# Altium PCB openmv4_wd.PcbDoc (part 1 of 2)
Units mil, origin at the board's own origin, x right, y up, seen from the top; angles counter-clockwise.
Board outline 6000 x 4000 mil, 2 copper layers (Top Layer, Bottom Layer); 54 components, 90 nets, 396 pads, 358 vias.
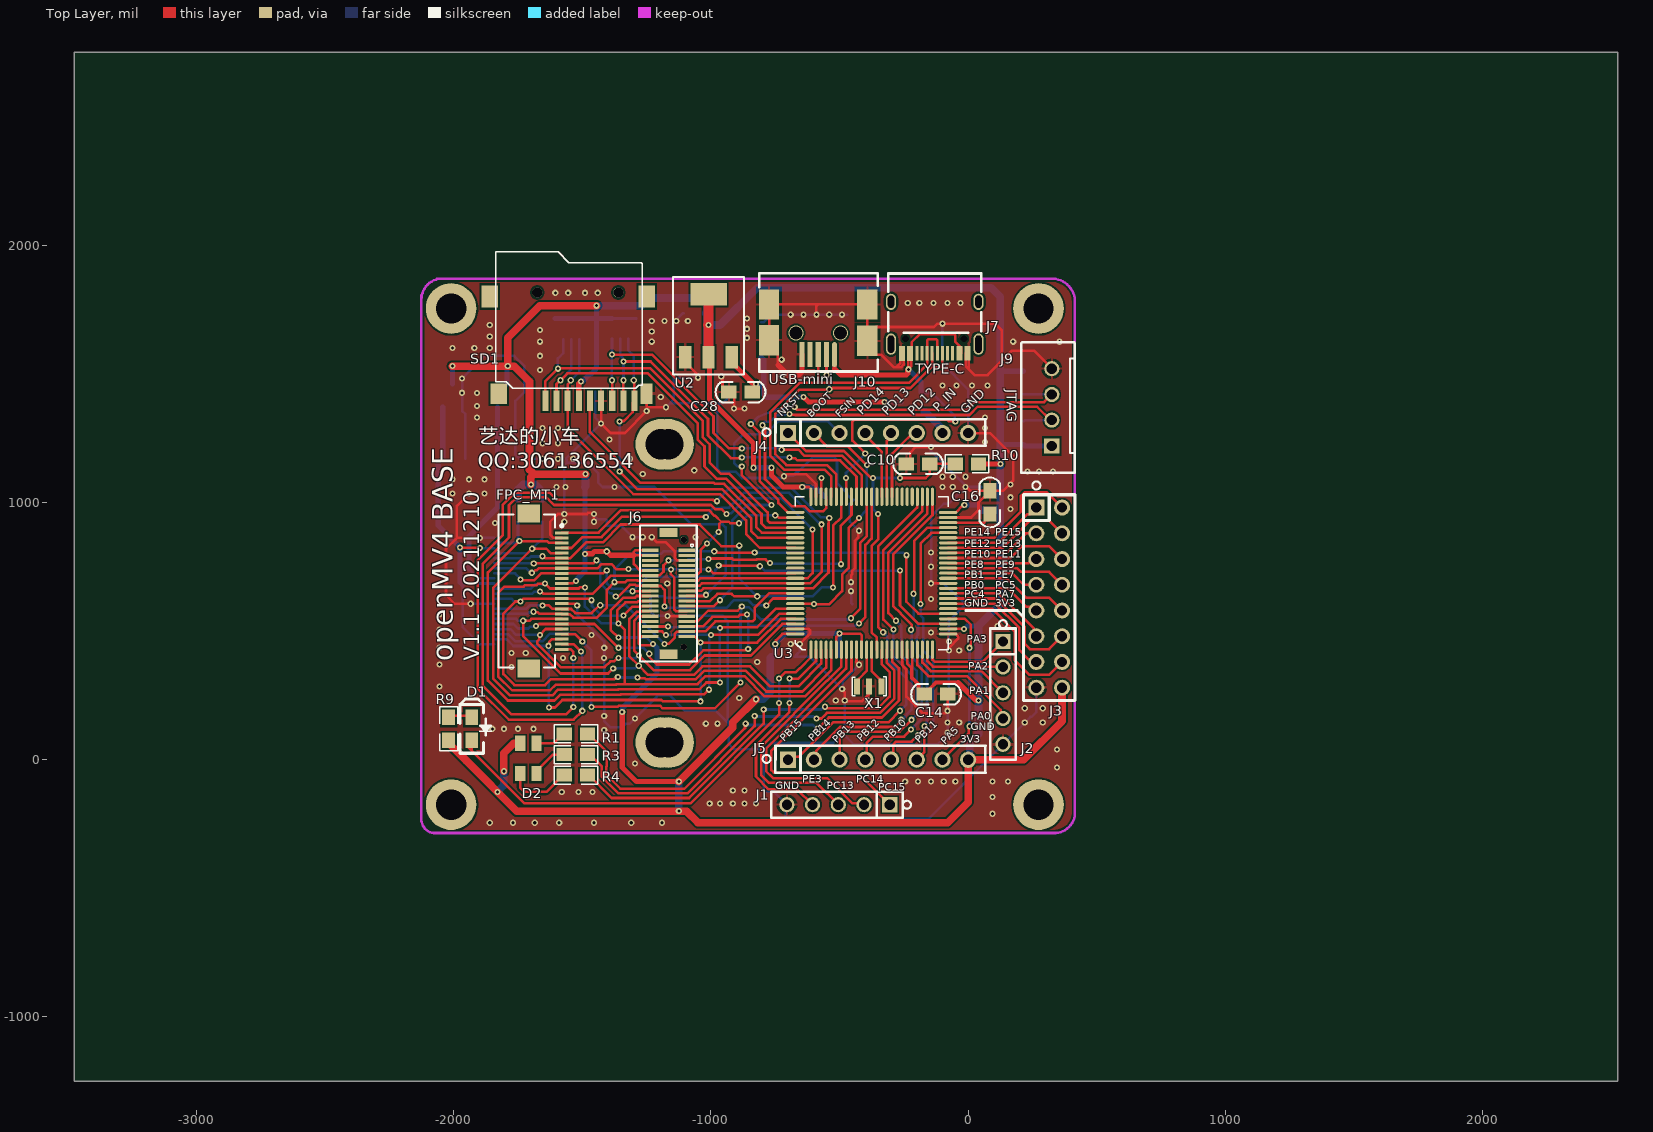
[diagram p0: Top Layer view]
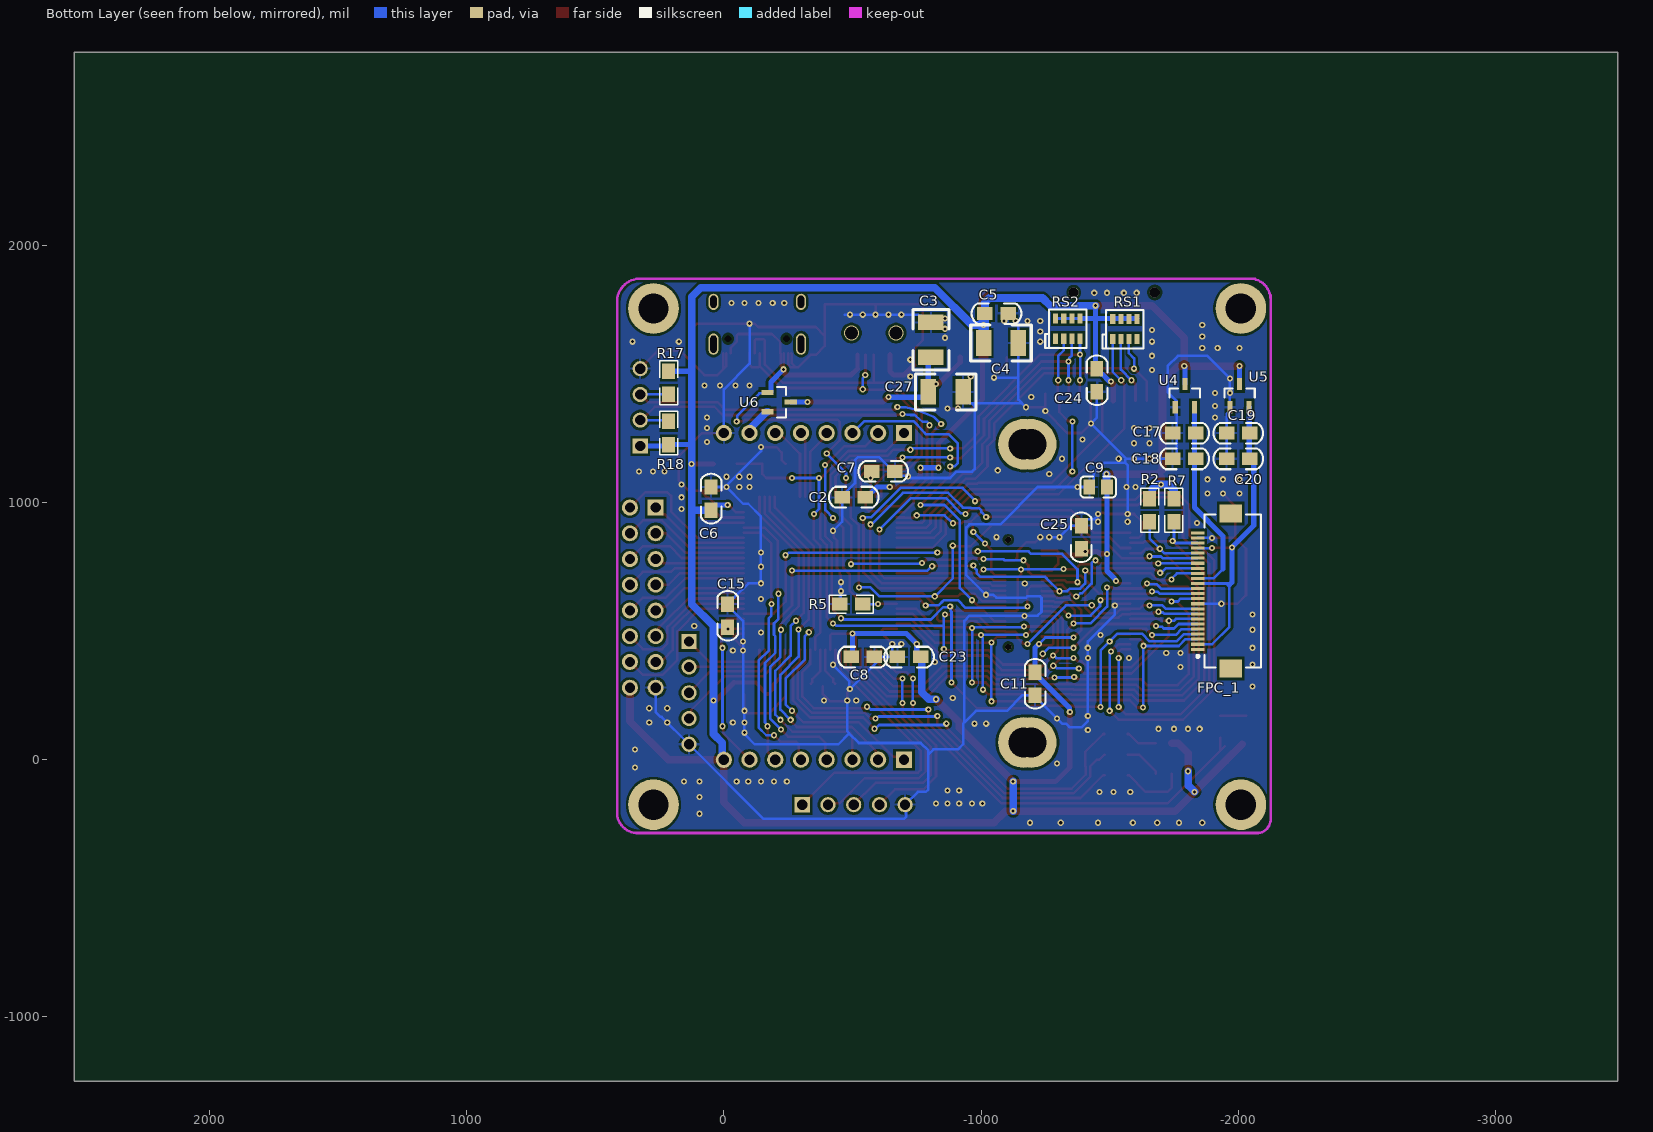
[diagram p1: Bottom Layer view, seen from below]

## Layer stack, top to bottom
Top Solder: solder mask 0.4, Solder Resist, Dk 3.5
Top Layer: signal copper 1.4
Dielectric 1: dielectric 12.6, FR-4, Dk 4.8
Bottom Layer: signal copper 1.4
Bottom Solder: solder mask 0.4, Solder Resist, Dk 3.5

## Board outline
-3475,-1250 2525,-1250 2525,2750 -3475,2750

## Design rules (kind name [scope] priority, off if disabled: settings)
Clearance [All] p1: gap=8 ignorepadtopadclearanceinfootprint=TRUE
PolygonConnect PolygonConnect_1 [IsVia] p1: connectstyle=Direct reliefconductorwidth=10 reliefentries=4 polygonreliefangle="90 Angle" airgapwidth=10
PolygonConnect [All] p2: connectstyle=Relief reliefconductorwidth=10 reliefentries=4 polygonreliefangle="90 Angle" airgapwidth=10
RoutingVias [All] p1: holewidth=12 width=24 viastyle="Through Hole" minholewidth=12 minwidth=24 maxholewidth=28 maxwidth=50
SolderMaskExpansion [All] p1: expansion=4 istentingtop=FALSE
Width [All] p1: maxlimit=40 minlimit=10 preferedwidth=10 minimp=50.000000 maximp=50.000000 favimp=50.000000
30 further rules are at their usual default settings.

## Components (designator, comment, footprint, x,y, rotation, side; value= is the part's Value field where it differs from the comment)
C2 "104" 0805C -460,1020 r180 bottom
C3 "47uF" 1210 -805,1565 r90 bottom value=22uF/10V
C4 "47uF" 1210 -1010,1620 r180 bottom value=22uF/10V
C5 "104" 0805C -1105,1735 r0 bottom
C6 "104" 0805C 50,1060 r270 bottom
C7 "2.2uf" 0805C -575,1120 r180 bottom
C8 "104" 0805C -585,400 r0 bottom
C9 "10uF" LC-0805_C -1455.55,1060 r180 bottom
C10 "104" 0805C -240,1150 r0 top
C11 "104" 0805C -1210,340 r270 bottom
C14 "104" 0805C -80,255 r180 top
C15 "104" 0805C -15,605 r270 bottom
C16 "2.2uf" 0805C 85,955 r90 top
C17 "104" 0805C -1835,1270 r0 bottom
C18 "106" 0805C -1835,1170 r0 bottom
C19 "104" 0805C -2045,1270 r0 bottom
C20 "106" 0805C -2045,1170 r0 bottom
C23 "104" 0805C -765,400 r0 bottom
C24 "104" 0805C -1450,1520 r270 bottom
C25 "104" 0805C -1390,820 r90 bottom
C27 "47uF" 1210 -795,1430 r180 bottom value=22uF/10V
C28 "104" 0805C -840,1430 r180 top
D1 "LED" 0805D -1930,165 r270 top
D2 "RGB_LED" LED_3528_RGB -1710,5 r90 top
FPC_1 "FPC_24" FPC_24 -1975,655 r90 bottom locked
FPC_MT1 "FPC_24" FPC_24 -1712.25,656 r270 top locked
J1 "IO" SIP5 -305,-175 r180 top
J2 "IO" SIP5 135,460 r270 top
J3 "SIP16" IDC16 265,-20 r270 top
J4 "SIP8" SIP8 -700,1270 r0 top locked
J5 "SIP8" SIP8 -700,0 r0 top locked
J6 "camera" ? -1165,410 r90 top locked
J7 "TYPE-C" "USB TYPE-C-16PIN_A" -130,1780 r180 top
J9 "JTAG" SIP4-1 325,1520 r270 top
J10 "USB-mini" USB-MINI -520,1575 r180 top
R1 "1K" 0805R -1480,100 r180 top value=300R
R2 "10K" 0805R -1655,925 r90 bottom
R3 "1K" 0805R -1480,20 r180 top value=300R
R4 "1K" 0805R -1570,-60 r0 top value=300R
R5 "10K" 0805R -540,605 r0 bottom
R7 "10K" 0805R -1750,1015 r270 bottom
R9 "1K" 0805R -2020,75 r90 top
R10 "10K" 0805R 40,1150 r180 top
R17 "10K" 0805R 215,1420 r90 bottom
R18 "10K" 0805R 215,1315 r270 bottom
RS1 "4.7k" 0603*4 -1606.5,1713.74 r0 bottom
RS2 "4.7K" 0603*4 -1384.49,1715 r0 bottom
SD1 "micro SD" TF卡座 -1545,1685 r90 top locked
U2 "1117-3.3" SOT223 -1100,1565 r0 top locked
U3 "STM32H743VIT6" "LQFP100 14X14_N" -375,725 r0 top locked
U4 "XC6206 1V5" SOT23-3N -1792.4,1415 r180 bottom
U5 "XC6206 2V8" SOT23-3N -2005,1415 r180 bottom
U6 "BAT54C" SOT23-3N -215,1390 r270 bottom
X1 "12M" XTAL-3215-3P -385,285 r0 top

## Footprints (in the part's own frame and the unit in brackets; to place one, negate y for a bottom-side part, rotate by r counter-clockwise, add the part's x,y. Pads: shape width x height; smd on the part's side, far side on the other; paste and mask are expansions set on the pad)
0603*4 [mm]
  rect 0.5x1 smd: 1(0,0) 2(0.8,0) 3(1.6,0) 4(2.4,0) 5(2.4,2) 6(1.6,2) 7(0.8,2) 8(0,2)
  silkscreen extent -0.64,-0.89 3.43,2.92
0805C [mil]
  rect 60x50 smd: 1(0,0) 2(90,0)
  silkscreen extent -52,-39 142,41
0805D [mil]
  rect 60x50 smd: 1(0,0) 2(90,0)
  silkscreen extent -71,-46 140,78
0805R [mil]
  rect 60x50 smd: 1(0,0) 2(90,0)
  silkscreen extent -40,-35 130,35
1210 [mil]
  rect 60x100 smd: 1(0,0) 2(135,0)
  silkscreen extent -50,-70 185,70
FPC_24 [mm]
  rect 0.3x1.3 smd: 1(-5.739,3.359) 2(-5.239,3.359) 3(-4.739,3.359) 4(-4.239,3.359) 5(-3.739,3.359) 6(-3.239,3.359) 7(-2.739,3.359) 8(-2.239,3.359) 9(-1.739,3.359) 10(-1.239,3.359) 11(-0.739,3.359) 12(-0.239,3.359) 13(0.261,3.359) 14(0.761,3.359) 15(1.261,3.359) 16(1.761,3.359) 17(2.261,3.359) 18(2.761,3.359) 19(3.261,3.359) 20(3.761,3.359) 21(4.261,3.359) 22(4.761,3.359) 23(5.261,3.359) 24(5.761,3.359)
  rect 1.8x2.2 smd: 25(-7.639,0.109) 26(7.661,0.109)
  silkscreen extent -7.54,-2.89 7.56,3.48, body extent -8.05,-3.05 8.15,2.95, height 2
IDC16 [mil]
  rect 62x62 hole 40: 1(-1000,0)
  round 62 hole 40: 2(-1000,100) 3(-900,0) 4(-900,100) 5(-800,0) 6(-800,100) 7(-700,0) 8(-700,100) 9(-600,0) 10(-600,100) 11(-500,0) 12(-500,100) 13(-400,0) 14(-400,100) 15(-300,0) 16(-300,100)
  silkscreen extent -1102,-50 -250,150
LC-0805_C [mm]
  rect 1.16x1.47 smd: 1(-0.875,0) 2(0.875,0)
  silkscreen extent -1.76,-1.04 1.76,1.04, body extent -1,-0.63 1,0.63, height 0.77
LED_3528_RGB [mm]
  rect 1.5x1 smd: 1(1.5,-0.8) 2(-1.5,-0.8) 3(-1.5,0.8) 4(1.5,0.8)
  body extent -1.79,-1.34 1.71,1.46, height 1.9
"LQFP100 14X14_N" [mm] "100脚，体宽14x14mm，脚距0.5mm"
  oval 0.3x1.8 smd: 1(-6,-7.55) 2(-5.5,-7.55) 3(-5,-7.55) 4(-4.5,-7.55) 5(-4,-7.55) 6(-3.5,-7.55) 7(-3,-7.55) 8(-2.5,-7.55) 9(-2,-7.55) 10(-1.5,-7.55) 11(-1,-7.55) 12(-0.5,-7.55) 13(0,-7.55) 14(0.5,-7.55) 15(1,-7.55) 16(1.5,-7.55) 17(2,-7.55) 18(2.5,-7.55) 19(3,-7.55) 20(3.5,-7.55) 21(4,-7.55) 22(4.5,-7.55) 23(5,-7.55) 24(5.5,-7.55) 25(6,-7.55) 51(6,7.55) 52(5.5,7.55) 53(5,7.55) 54(4.5,7.55) 55(4,7.55) 56(3.5,7.55) 57(3,7.55) 58(2.5,7.55) 59(2,7.55) 60(1.5,7.55) 61(1,7.55) 62(0.5,7.55) 63(0,7.55) 64(-0.5,7.55) 65(-1,7.55) 66(-1.5,7.55) 67(-2,7.55) 68(-2.5,7.55) 69(-3,7.55) 70(-3.5,7.55) 71(-4,7.55) 72(-4.5,7.55) 73(-5,7.55) 74(-5.5,7.55) 75(-6,7.55)
  oval 1.8x0.3 smd: 26(7.55,-6) 27(7.55,-5.5) 28(7.55,-5) 29(7.55,-4.5) 30(7.55,-4) 31(7.55,-3.5) 32(7.55,-3) 33(7.55,-2.5) 34(7.55,-2) 35(7.55,-1.5) 36(7.55,-1) 37(7.55,-0.5) 38(7.55,0) 39(7.55,0.5) 40(7.55,1) 41(7.55,1.5) 42(7.55,2) 43(7.55,2.5) 44(7.55,3) 45(7.55,3.5) 46(7.55,4) 47(7.55,4.5) 48(7.55,5) 49(7.55,5.5) 50(7.55,6) 76(-7.55,6) 77(-7.55,5.5) 78(-7.55,5) 79(-7.55,4.5) 80(-7.55,4) 81(-7.55,3.5) 82(-7.55,3) 83(-7.55,2.5) 84(-7.55,2) 85(-7.55,1.5) 86(-7.55,1) 87(-7.55,0.5) 88(-7.55,0) 89(-7.55,-0.5) 90(-7.55,-1) 91(-7.55,-1.5) 92(-7.55,-2) 93(-7.55,-2.5) 94(-7.55,-3) 95(-7.55,-3.5) 96(-7.55,-4) 97(-7.55,-4.5) 98(-7.55,-5) 99(-7.55,-5.5) 100(-7.55,-6)
  silkscreen extent -7.57,-7.57 7.57,7.54
SIP4-1 [mm]
  rect 1.5x1.5 hole 1: 1(7.62,0)
  round 1.5 hole 1: 2(5.08,0) 3(2.54,0) 4(0,0)
  silkscreen extent -2.6,-3 10.26,2.29
SIP5 [mm]
  rect 1.5x1.5 hole 1: 1(0,0)
  round 1.5 hole 1: 2(2.54,0) 3(5.08,0) 4(7.62,0) 5(10.16,0)
  silkscreen extent -2.1,-1.27 11.68,1.27
SIP8 [mm]
  rect 1.6x1.6 hole 1: 1(0,0)
  round 1.6 hole 1: 2(2.54,0) 3(5.08,0) 4(7.62,0) 5(10.16,0) 6(12.7,0) 7(15.24,0) 8(17.78,-0.008)
  silkscreen extent -2.53,-1.27 19.51,1.37
SOT23-3N [mm] "3x1.3x1mm(长宽高)"
  rect 0.5x1.2 smd: 1(-0.95,-1.143) 2(0.95,-1.143) 3(0,1.143)
  silkscreen extent -1.5,-0.2 1.5,0.7, body extent -1.5,-1.2 1.5,1.2, height 1.05
SOT223 [mm]
  rect 1.2x2.2 smd: 1(0,0) 2(2.3,0) 3(4.6,0)
  rect 3.6x2.2 smd: 4(2.3,6.2)
  silkscreen extent -1.2,-1.7 5.8,7.9
TF卡座 [mm]
  round 1 hole 1 unplated: 0(3.334,-4.696) 0(3.334,3.305)
  rect 2x0.6 smd: 1(-7.366,2.505) 2(-7.366,1.405) 3(-7.366,0.305) 4(-7.366,-0.795) 5(-7.366,-1.895) 6(-7.366,-2.995) 7(-7.366,-4.095) 8(-7.366,-5.195) 9(-7.366,-6.295)
  rect 2x1.2 smd: 10(-6.666,-7.495)
  rect 2.2x1.6 smd: 11(2.934,-7.495) 12(2.934,8.005)
  rect 2x1.6 smd: 13(-6.666,7.105)
  silkscreen extent -6.12,-7.04 7.35,7.4, body extent -7.82,-7.8 9.38,8.3, height 3.2
"USB TYPE-C-16PIN_A" [mm]
  round 0 hole 0.65: 0(-2.89,3.65) 0(2.89,3.65)
  oval 1x2.1 hole 0.6 slot 1.7 at 90 deg: 1(-4.32,4.18) 1(4.32,4.18)
  oval 1x1.6 hole 0.6 slot 1.2 at 90 deg: 1(-4.32,0) 1(4.32,0)
  rect 0.3x1.45 smd: A1(-3.375,5.092) A4(-2.6,5.092) A5(-1.25,5.092) A6(-0.25,5.092) A7(0.25,5.092) A8(-1.75,5.092) A9(2.6,5.1) A12(3.375,5.1) B1(3.075,5.1) B4(2.3,5.1) B5(1.75,5.092) B6(0.75,5.092) B7(-0.75,5.092) B8(1.25,5.092) B9(-2.3,5.092) B12(-3.075,5.092)
  silkscreen extent -4.57,-2.79 4.57,3.05, body extent -4.47,-2.6 4.47,5.3, height 3.25
USB-MINI [mm]
  rect 2x3 smd: 0(-3.25,-1.346) 0(-3.25,-4.946) 0(6.45,-1.425) 0(6.45,-4.946)
  oval 0.5x2.45 smd: 1(0,0)
  rect 0.5x2.45 smd: 2(0.8,0) 3(1.6,0) 4(2.4,0) 5(3.2,0)
  round 1.5 hole 1.3: ""(-0.6,-2.125) ""(3.8,-2.125)
  silkscreen extent -4.27,-8.03 7.44,1.68
XTAL-3215-3P [mm]
  rect 0.6x1.6 smd: 1(-1.2,0) 2(0,0) 3(1.2,0)
  silkscreen extent -1.68,-0.94 1.68,0.94, body extent -1.6,-0.74 1.6,0.76, height 0.9
? [mil] "DF12-36-DS"
  round 24 hole 24: 1(27.56,-59.06) 1(445.22,-59.06)
  rect 12x63 smd: 1(404.22,-70.87) 2(404.22,71) 3(384.22,-70.87) 4(384.22,71) 5(364.22,-70.87) 6(364.22,71) 7(345.22,-70.87) 8(345.22,71) 9(325.22,-70.87) 10(325.22,71) 11(305.22,-70.87) 12(305.22,71) 13(286.22,-70.87) 14(286.22,71) 15(266.22,-70.87) 16(266.22,71) 17(246.22,-70.87) 18(246.22,71) 19(226.38,-70.87) 20(226.38,71) 21(206.69,-70.87) 22(206.69,71) 23(187.01,-70.87) 24(187.01,71) 25(167.32,-70.87) 26(167.32,71) 27(147.64,-70.87) 28(147.64,71) 29(127.95,-70.87) 30(127.95,71) 31(108.27,-70.87) 32(108.27,71) 33(88.58,-70.87) 34(88.58,71) 35(68.9,-70.87) 36(68.9,71)
  rect 36x71 smd: F1(473.22,0) F2(0,0)
  round 196.85 hole 118.11: ""(-342.99,0) ""(-342.99,30) ""(816.21,30) ""(816.22,0)
  silkscreen extent -29,-110 501,110

## Part data
C2 C6 C7 C8 C9 C10 C11 C14 C15 C16 C17 C18 C19 C20 C23 C24 C25 C28: library part CAP
C3 C4 C27: library part "Cap Pol1", "Polarized Capacitor (Radial)", LatestRevisionDate=17-Jul-2002, LatestRevisionNote="Re-released for DXP Platform.", PackageReference=RB7.6-15, Published=8-Jun-2000, Publisher="Altium Limited"
C5: library part CAP104
D2: "三色高亮LED"
J1 J2: library part SIP5
J6: library part IDC36
J7: library part USB_C
J9: library part SIP4
J10: library part USB-CON-MICRO-B-5S, BOM_Manufacturer=ValuePro, BOM_Manufacturer Part=USB-CON-MICRO-B-5S, BOM_Supplier=LCSC, BOM_Supplier Part=C40954, image=//image.lceda.cn/szlcsc/C40954.jpg, spicePre=U, spiceSymbolName=USB-CON-MICRO-B-5S
R1 R3 R4 R17 R18: library part Res2, "Resistor", LatestRevisionDate=17-Jul-2002, LatestRevisionNote="Re-released for DXP Platform.", PackageReference=AXIAL-0.4, Published=8-Jun-2000, Publisher="Altium Limited"
R2 R5 R7 R9 R10: library part RES
RS1 RS2: library part RS
U2: library part 1117
U4 U5: library part XC6206P332MR, "低压差线性稳压芯片", BOM名称=低压差线性稳压芯片, 学习资源=www.ooocke.com, 版权归属=源创客
X1: library part XTAL_3P

## Free pads (board coordinates)
  round 196.85 hole 118.11: 0(-2010,-175) 0(-2010,1754.13) 0(273.46,-175) 0(273.46,1754.13)

## Via types
v1: diameter 24, hole 12, Top Layer to Bottom Layer, 358 vias

## Nets (pads, with @x,y where several pads share a name; then routed paths per layer and width w, separated by ;. In a path a pad name is that pad's centre, name@x,y a point inside that pad or via, vN(x,y) a via of type N, cw(c..) or ccw(c..) an arc to the next point about the centre after c; other vN are vias at no path point)
1V5: C17.1 C18.1 FPC_1.15 U4.2 | length 787
  Bottom Layer w10: -1940,740.86 -1903.77,704.63 FPC_1.15@-1842.75,704.63
  Bottom Layer w20: -1940,740.86 -1940,870 -1829.8,980.2 U4.2@-1829.8,1370
2V8: C19.1 C20.1 FPC_1.2 FPC_1.14 FPC_1.21 U5.2 | length 1310.4
  Top Layer w10: v1(-1975,825) -1973.87,823.87 -1898.39,823.87 v1(-1897.26,822.74)
  Bottom Layer w10: v1(-1897.26,822.74) FPC_1.21@-1842.75,822.74 ; FPC_1.2@-1842.75,448.72 -1898.72,448.72 -1965,515 -1965,680 -1960.06,684.94 FPC_1.14@-1842.75,684.94
  Bottom Layer w20: U5.2@-2042.4,1370 -2042.4,1270 -2042.4,1170 C20.1@-2045,1170 -2060,1155 -2060,910 v1(-1975,825) -1975,690 -1965,680
3V3: C2.2 C4.1 C5.2 C6.2 C8.2 C9.2 C11.1 C14.2 C15.2 C23.1 C24.1 C25.1 D2.4 FPC_MT1.11 J3.16 J5.8 J6.2 J6.4 J6.10 J6.20 J6.30 J6.36 J9.1 R2.2 R7.1 R9.1 R10.1 R17.2 R18.2 RS1.1 RS1.2 RS1.3 RS1.4 RS2.1 RS2.2 RS2.3 RS2.4 SD1.4 U2.2 U2.4 U3.6 U3.11 U3.20 U3.21 U3.27 U3.50 U3.75 U3.100 U4.3 U5.3 | length 15656.8
  Top Layer w10: FPC_MT1.11@-1580,685.11 -1538.68,685.11 -1528.79,695 v1(-1525,695) ; v1(-1360,475) -1390,505 -1390,579.54 -1339.72,629.82 -1294.47,629.82 -1287.91,636.38 J6.20@-1236,636.38 ; J6.36@-1236.68,479.58 J6.36@-1236,478.9 -1278.04,478.9 -1281,481.86 ; J6.30@-1236,537.95 -1236.69,537.27 -1272.88,537.27 -1281,529.15 -1281,481.86 ; J6.10@-1236,735.22 -1275.22,735.22 -1300,760 -1300,795 ; J6.4@-1236,794.22 -1299.22,794.22 -1300,795 ; J6.2@-1236,814.22 -1294.14,814.22 -1300,808.36 -1300,795 ; v1@-1230,450 -1235,445 -1275.14,445 -1281,450.86 -1281,481.86 ; v1(-750,450) -747.32,452.68 -747.32,464.14 -722.68,488.78 U3.100@-672.24,488.78 ; v1(-645,1060) -619.94,1060 -611.22,1051.28 U3.75@-611.22,1022.24 ; U3.6@-512.8,427.76 -512.8,477.2 v1(-500,490) -420.23,490 -414.37,484.14 U3.11@-414.37,427.76 ; U3.20@-237.2,427.76 -237.2,374.03 -222,358.82 -222,317 -217.52,312.52 -217.52,317 U3.21@-217.52,427.76 ; C14.2@-193.11,275 -173.11,255 C14.2@-170,255 ; U3.27@-77.76,508.46 v1(-16.54,508.46) v1@-15,510 ; U3.50@-77.76,961.22 -48.23,961.22 -22.13,987.32 -17.68,987.32 v1(-15,990) ; v1@30,230 v1(40,230)
  Top Layer w15: -217.52,317 -193.11,292.59 C14.2@-193.11,275 ; C14.2@-170,255 -165,255 -147.5,272.5 -147.5,277.5 -125,300 -40,300
  Top Layer w20: SD1.4@-1513.69,1395 -1513.69,1461.31 v1(-1505,1470) ; v1(-1490,800) -1489.23,800.77 -1461.66,800.77 -1452.43,810 -1406.85,810 v1@-1405,808.15 ; v1@-1405,805 -1400,805 -1390,795 -1300,795 ; v1(-1345,185) -1345,-30 -1290,-85 v1(-1125,-85) ; U2.2@-1009.45,1565 -1005,1560.55 -1005,1400 -835,1230 v1(-835,1135) ; v1(-765,1135) -764.23,1134.23 -764.23,1105.57 -718.67,1060 v1(-645,1060) ; -40,300 v1@30,230 ; R10.1@40,1150 v1(125,1150)
  Top Layer w30: R9.1@-2015,60 -1950,-5 -1755,-200 v1(-1125,-200) -1095,-200 -1050,-245 -80,-245 0,-165 J5.8@0,-0.32 0,0 215,0 365,150 J3.16@365,280 ; v1(-2005,1530) v1(-1790,1530) ; v1(-1805,-45) -1805,25 -1765.94,64.06 D2.4@-1741.5,64.06 ; v1(-1700,1070) -1700,1097.43 -1687.43,1110 ; v1(-1487.52,1110) -1687.43,1110 ; v1(-1445,1765) -1665,1765 -1790,1640 v1(-1790,1530) ; v1(-1125,-85) -915,125 -915,145 v1(-825,235) ; v1(-1790,1530) -1765,1530 -1705,1470 -1705,1127.57 -1687.43,1110
  Top Layer w40: U2.2@-1009.45,1565 -1009.45,1689.45 v1(-1010,1690) -1009.45,1690.55 U2.4@-1009.45,1809.09
  Bottom Layer w10: RS1.1@-1606.5,1713.74 RS1.1@-1605.24,1715 ; RS2.1@-1384.49,1715 RS2.2@-1352.99,1715 RS2.3@-1321.5,1715 RS2.4@-1290,1715 ; v1(-1360,475) -1250,475 v1(-1225,450) ; C23.1@-765,400 C23.1@-750,415 ; C2.2@-555,1020 C2.2@-550,1020 ; C8.2@-500,405 C8.2@-495,400 ; v1(-16.54,508.46) C15.2@-5,520
  Bottom Layer w20: U5.3@-2005,1460 v1(-2005,1530) ; U4.3@-1792.4,1460 -1792.4,1526.52 -1790,1528.92 v1(-1790,1530) ; RS1.1@-1605.24,1715 -1445,1715 ; v1(-1525,695) -1525,696.08 -1519.23,701.85 -1519.23,704.55 -1490,733.79 v1(-1490,800) C9.2@-1490,1060 ; v1(-1505,1470) -1504.23,1470.77 -1499.23,1470.77 -1470,1500 -1465,1500 -1450,1515 C24.1@-1450,1520 -1445,1525 -1445,1715 ; v1(-1445,1765) -1445,1715 ; RS2.1@-1384.49,1715 -1445,1715 ; v1(-1345,185) -1344.23,185.77 -1344.23,200.77 -1210,335 C11.1@-1210,340 -1210,435 v1(-1225,450) ; v1(-835,1135) v1(-765,1135) ; C23.1@-750,415 v1(-750,450) -710,490 v1(-500,490) C8.2@-500,405 ; v1(-645,1060) -595,1060 C2.2@-555,1020 ; v1(-15,990) 35,990 50,975 C6.2@50,970 ; C15.2@-5,520 40,520 ; 125,1220 130,1225 R18.2@215,1225 220,1220 J9.1@325,1220 ; 125,1505 130,1510 R17.2@215,1510
  Bottom Layer w30: v1(-1830,-125) -1805,-100 v1(-1805,-45) ; R7.1@-1750,1015 -1750,1050 -1730,1070 v1(-1700,1070) -1682.57,1070 -1665,1052.43 -1665,1025 R2.2@-1655,1015 ; C9.2@-1490,1060 -1487.52,1062.48 v1(-1487.52,1110) ; v1(-1445,1765) -1268.79,1765 -1238.79,1795 -1032.57,1795 -1015,1777.43 C5.2@-1015,1735 ; v1(-1125,-200) v1(-1125,-85) ; v1(-1010,1690) -965,1690 -820,1835 90,1835 125,1800 125,1505 125,1220 v1(125,1150) 125,970 ; v1(-825,235) -797.57,235 -770,262.57 -770,395 C23.1@-765,400 ; J5.8@0,0 6.31,6.31 6.31,66.31 40,100 v1(40,230) 40,520 125,605 125,970 ; C6.2@50,970 125,970
  Bottom Layer w40: C5.2@-1015,1735 -1010,1730 v1(-1010,1690) C4.1@-1010,1620
  other v1: -1405,810
5V_IN: J7.A4 J7.A9 J7.B4 J7.B9 J10.1 U3.68 U6.1 | length 1857.4
  Top Layer w10: v1(-475,1095) -473.77,1093.77 -473.77,1022.59 U3.68@-473.43,1022.24 ; v1(-400,1190) -450,1240 -450,1314.14 -442.14,1322 -82,1322 -75,1315 v1(-50,1315) ; v1@-235.04,1514.96 v1(-232.36,1517.64) ; J7.A9@-232.36,1579.22 v1(-232.36,1517.64) ; J7.A4@-27.63,1579.53 -27.63,1602.17 -50,1624.54 -50,1649.14 -55.86,1655 -187.41,1655 -219.65,1622.76 -219.65,1580.12 J7.B4@-220.55,1579.22 -220.55,1529.45 v1(-232.36,1517.64)
  Top Layer w15: -520,1520 J10.1@-520,1575
  Top Layer w20: -520,1520 -494.96,1494.96 -240.9,1494.96 -235.04,1500.82 v1@-235.04,1514.96
  Bottom Layer w10: v1(-475,1095) -475,1115 v1@-401.51,1188.49 ; U6.1@-170,1427.4 -166.46,1423.86 -138.86,1423.86 -52.68,1337.68 -52.68,1317.68 v1(-50,1315)
  Bottom Layer w20: v1(-232.36,1517.64) -183.37,1468.64 -183.37,1427.56 -183.21,1427.4 U6.1@-170,1427.4
BOOT0: J4.2 R5.1 U3.94 | length 1051.4
  Top Layer w10: U3.94@-672.24,606.89 -671.9,606.54 -601.54,606.54 v1(-600,605) -540,605 -490,655 -490,720 -465,745 -465,900 v1(-425,940) ; J4.2@-599.36,1269.36 -548,1218 -468,1218 -396.21,1146.21 v1(-393.79,1146.21)
  Bottom Layer w10: v1(-600,605) R5.1@-540,605 ; v1(-425,940) -395,970 -395,1145 v1(-393.79,1146.21)
"DCMI CLK": FPC_1.12 FPC_MT1.13 J6.12 U3.67 | length 1716.4
  Top Layer w10: v1(-1664.66,654.47) -1660.88,654.47 -1652.47,646.06 -1652.14,645.74 FPC_MT1.13@-1580,645.74 -1579.26,645 -1460,645 -1390,715 -1335.19,715 -1334.37,715.82 -1279.56,715.82 -1278.95,715.22 J6.12@-1236,715.22 -1235,716.22 -1199.12,716.22 -1184.34,730.99 -1184.34,755.74 v1(-1165.08,775) ; v1(-1010,780) -1008,782 -917.36,782 -913.36,778 -822.18,778 -821.18,779 -787.79,779 -773.79,765 v1(-770,765) ; v1(-495,760) -495,910 -453.74,951.26 U3.67@-453.74,1022.24
  Bottom Layer w10: FPC_1.12@-1842.75,645.57 -1693.97,645.57 -1687.22,652.32 -1666.81,652.32 v1(-1664.66,654.47) ; v1(-1165.08,775) -1091.38,775 -1086.38,780 v1(-1010,780) ; v1(-770,765) -767.5,762.5 -497.5,762.5 v1(-495,760)
"DCMI D0": FPC_1.6 FPC_MT1.19 J6.31 U3.63 | length 2440.4
  Top Layer w10: v1(-1680,520) -1676.21,520 -1668.58,527.63 -1452.63,527.63 v1(-1360,435) ; v1(-1240,412) -1241.86,410.14 -1241.86,401.86 -1210,370 -1085,370 -1030,425 -867.86,425 -865.36,427.5 -857.86,427.5 v1(-855.18,430.18) ; J6.31@-1094.13,518.27 -1031.73,518.27 -994.57,555.43 -894.57,555.43 -887,563 -862,563 v1(-860.18,564.82) ; v1(-425,530) -400,555 -400,834.54 -375,859.54 U3.63@-375,1022.24
  Bottom Layer w10: FPC_1.6@-1842.75,527.46 -1767.46,527.46 -1750,510 -1710,510 -1702.68,517.32 -1682.68,517.32 v1(-1680,520) ; v1(-1360,435) -1263,435 v1(-1240,412) ; v1(-860.18,564.82) -859.82,564.82 -855,560 -855,525 ; v1(-855.18,430.18) -855,430.36 -855,525 ; v1(-425,530) -427.86,530 -437.86,520 -850,520 -855,525
"DCMI D1": FPC_1.4 FPC_MT1.21 J6.29 U3.64 | length 2848.1
  Top Layer w10: FPC_MT1.21@-1580,488.26 -1528.26,488.26 v1(-1500,460) ; v1(-1465,205) -1363.18,205 -1358.18,210 -1198.5,210 -1188.5,200 -985,200 v1(-885,300) ; J6.29@-1094.13,537.95 -1052.05,537.95 -1010.99,579.01 -895.99,579.01 v1(-880,595) ; v1(-455,550) -455,550.97 -420,585.97 -420,842.83 -395.03,867.8 -395.03,991.88 -394.68,992.23 U3.64@-394.68,1022.24
  Bottom Layer w10: FPC_1.4@-1842.75,488.09 -1788.09,488.09 -1760,460 -1655,460 -1625,490 -1530,490 -1465,425 v1(-1465,205) ; v1(-885,300) -885,450 -885.18,450.18 -885.18,575.18 -882.68,577.68 -882.68,592.32 v1(-880,595) -878,593 -853,593 -805,545 -467.86,545 -465.54,547.32 -457.68,547.32 v1(-455,550)
"DCMI D2": FPC_1.3 FPC_MT1.22 J6.35 U3.97 | length 1841.9
  Top Layer w10: v1(-1631.95,442.76) -1629.27,445.44 -1629.27,457.87 -1618.57,468.58 FPC_MT1.22@-1580,468.58 ; v1@-1630,210 v1(-1630,203) -1607,203 -1578,232 -1192.22,232 -1187.22,227 v1(-1040,227) ; J6.35@-1094.13,478.9 -1093.13,477.9 -1083,477.9 -1062.9,477.9 v1(-1040,455) -927.41,455 -927.23,455.18 -821.1,455.18 -728.45,547.83 U3.97@-672.24,547.83
  Bottom Layer w10: FPC_1.3@-1842.75,468.41 -1795,468.41 -1768.59,442 -1632.71,442 v1(-1631.95,442.76) -1630.97,441.79 -1630.97,203.97 v1(-1630,203) ; v1(-1040,227) v1(-1040,455)
"DCMI D3": FPC_1.5 FPC_MT1.20 J6.28 U3.98 | length 1690.5
  Top Layer w10: v1(-1665.18,485.18) -1667.86,482.5 -1667.86,467.6 -1675,460.46 -1675,450.46 -1584.54,360 -1413.18,360 -1391.18,382 -1376.79,382 -1363.79,395 v1(-1360,395) ; v1@-1665,485.18 -1665,485.64 -1642.69,507.95 FPC_MT1.20@-1580,507.95 ; J6.28@-1236,557.64 -1280.99,557.64 -1299,539.63 -1299,424.18 -1280,405.18 v1(-1280,405) -1223,348 -1081.54,348 -1024.54,405 -845,405 -721.85,528.15 U3.98@-672.24,528.15
  Bottom Layer w10: FPC_1.5@-1842.75,507.78 -1780,507.78 -1757.45,485.23 v1(-1665.18,485.18) v1(-1665.18,485.18) ; v1(-1360,395) -1292.86,395 -1282.86,405 v1(-1280,405)
"DCMI D4": FPC_1.7 FPC_MT1.18 J6.26 U3.3 | length 2001.6
  Top Layer w10: FPC_MT1.18@-1580,547.32 -1697.68,547.32 -1705,540 v1(-1730,540) -1730,480 -1585,335 -1400,335 v1(-1380,355) ; J6.26@-1236,577.32 -1236.69,576.64 -1271.28,576.64 -1272.1,575.82 -1288.27,575.82 -1317,547.09 -1317,401.54 v1(-1280.73,365.27) -1245.46,330 -1066.72,330 -1033.72,363 -848,363 -770,285 -660,285 -571.85,373.15 U3.3@-571.85,427.76
  Bottom Layer w10: FPC_1.7@-1842.75,547.15 -1757.15,547.15 -1750,540 v1(-1730,540) ; v1(-1380,355) -1294.79,355 -1284.52,365.27 v1(-1280.73,365.27)
"DCMI D5": FPC_1.9 FPC_MT1.16 J6.33 U3.92 | length 1379.3
  Top Layer w10: v1(-1655,600) -1630,600 -1616.69,586.69 FPC_MT1.16@-1580,586.69 -1579.22,585.91 -1543.25,585.91 -1527.35,570 -1463.79,570 -1433.38,600.41 v1(-1430.41,600.41) ; v1(-1180,450) -1165,450 -1140,475 -1140,490 -1132.1,497.9 -1094.81,497.9 J6.33@-1094.13,498.58 -1021.42,498.58 -982.57,537.43 -838.43,537.43 -830,545.86 -830,590 -773.74,646.26 U3.92@-672.24,646.26
  Bottom Layer w10: FPC_1.9@-1842.75,586.52 -1841.97,587.3 -1717.7,587.3 -1705,600 v1(-1655,600) ; v1(-1430.41,600.41) -1430,600 -1330,600 v1(-1180,450)
"DCMI D6": FPC_1.11 FPC_MT1.14 J6.24 U3.4 | length 2437
  Top Layer w10: v1(-1465,620) -1468.79,620 -1474.84,626.06 FPC_MT1.14@-1580,626.06 -1728.94,626.06 v1(-1740,615) -1760,615 -1807,568 -1807,332.46 -1764.54,290 -1645,290 -1623,312 -1377.36,312 -1374.27,315.09 -1371.7,315.09 -1365.79,321 v1(-1362,321) ; v1(-1340,560) -1306.18,593.82 -1279.56,593.82 -1277.05,596.32 -1236.68,596.32 J6.24@-1236,597.01 ; v1(-1285,320) -1282.32,317.32 -1258.23,317.32 -1252.91,312 -1059.27,312 -1026.27,345 -864.54,345 -784.54,265 -645,265 -552.17,357.83 U3.4@-552.17,427.76
  Bottom Layer w10: FPC_1.11@-1842.75,625.89 -1775.89,625.89 -1765,615 v1(-1740,615) ; v1(-1465,620) -1462.32,617.32 -1462.32,596.97 -1425.36,560 v1(-1340,560) ; v1(-1362,321) -1360.5,319.5 -1285.5,319.5 v1(-1285,320)
"DCMI D7": FPC_1.13 FPC_MT1.12 J6.22 U3.5 | length 3060.8
  Top Layer w10: v1(-1490,670) -1510,670 -1514.57,665.43 FPC_MT1.12@-1580,665.43 -1625.43,665.43 v1(-1645,685) -1645.64,684.36 -1672,684.36 -1679.04,677.32 -1724.49,677.32 -1728.82,673 -1802,673 -1827,648 -1827,324.17 -1772.83,270 -1624.85,270 -1602.85,292 -1369.07,292 -1367.07,294 -1051.81,294 -1020.81,325 -870,325 -791,246 -634.46,246 -555.46,325 -555,325 -532.48,347.52 U3.5@-532.48,427.76 ; -1335,294 -1335,505 -1362.68,532.68 -1362.68,540.54 -1365,542.86 -1365,579.09 -1332.27,611.82 -1287.01,611.82 -1282.14,616.69 J6.22@-1236,616.69
  Bottom Layer w10: FPC_1.13@-1842.75,665.26 -1699.74,665.26 -1682.68,682.32 -1647.68,682.32 v1(-1645,685) ; v1(-1490,670) -1490,595 -1425,530 v1(-1360,530)
"DCMI HSYNC": FPC_1.16 FPC_MT1.9 J6.18 U3.28 | length 2150.9
  Top Layer w10: v1(-1740,700) -1737.32,697.32 -1687.32,697.32 -1670,714.64 -1670,715 -1660.52,724.48 FPC_MT1.9@-1580,724.48 -1435.46,724.48 ; -1435,724.95 -1435.46,724.48 ; v1(-1405,735) -1408.79,735 -1419.31,724.48 -1435.46,724.48 ; v1(-1304.82,654.82) -1304.12,655.52 -1236.7,655.52 J6.18@-1236,656.22 ; v1(-970,755) -968.5,753.5 -811.5,753.5 v1(-810,752) ; v1(-265,735) -265,600 -193.15,528.15 U3.28@-77.76,528.15
  Bottom Layer w10: FPC_1.16@-1842.75,724.31 -1760.94,724.31 -1740,703.37 v1(-1740,700) ; v1(-1405,735) -1405,684.64 -1385.36,665 -1345,665 -1335,655 -1305,655 v1(-1304.82,654.82) -1255,704.64 -1255,705.14 -1249.14,711 -997.99,711 -983,725.99 -983,738.21 -970,751.21 v1(-970,755) ; v1(-810,752) -808.21,752 -791.21,735 v1(-265,735)
"DCMI PCLK": FPC_1.8 FPC_MT1.17 J6.14 U3.30 | length 2304.2
  Top Layer w10: v1(-1690,575) -1688.41,573.41 -1673.41,573.41 -1667,567 FPC_MT1.17@-1580,567 -1579.22,566.22 -1549.02,566.22 -1534.8,552 -1443.46,552 -1405.41,590.05 -1405.41,609.59 -1405,610 -1405,660 v1(-1375,690) -1333.02,690 -1325.2,697.82 -1287.01,697.82 -1285.41,696.22 J6.14@-1236,696.22 ; v1(-987.14,810) -984.46,807.32 -976.61,807.32 -974.28,805 v1(-830,805) ; v1(-240,795) -240,613.99 -193.53,567.52 U3.30@-77.76,567.52
  Bottom Layer w10: FPC_1.8@-1842.75,566.83 -1841.97,567.61 -1711.93,567.61 -1707.22,572.32 -1692.68,572.32 v1(-1690,575) ; v1(-1375,690) -1375,740 -1315,800 -1195,800 -1185,810 v1(-987.14,810) ; v1(-830,805) -253.79,805 -243.79,795 v1(-240,795)
"DCMI PWDN": FPC_1.17 FPC_MT1.8 J6.25 U3.88 | length 1420.3
  Top Layer w10: v1(-1696.41,726.41) -1692.63,726.41 -1683.04,736 -1677.28,736 -1669.75,743.53 -1656.47,743.53 -1655.83,744.17 FPC_MT1.8@-1580,744.17 -1579.22,744.95 -1439.7,744.95 -1424.64,760 -1386.48,760 -1366.48,740 -1320.82,740 v1(-1320,740.82) ; v1(-1155,740) -1155.91,739.09 -1155.91,720.91 -1142.32,707.32 -1142.32,583.18 -1136.47,577.32 J6.25@-1094.13,577.32 ; v1(-1010,740) -1006.21,740 -991.21,725 U3.88@-672.24,725
  Bottom Layer w10: FPC_1.17@-1842.75,744 -1717.79,744 -1700.2,726.41 v1(-1696.41,726.41) ; v1(-1320,740.82) -1319.59,740.41 -1155.41,740.41 v1(-1155,740) v1(-1010,740)
"DCMI RST": FPC_1.19 FPC_MT1.6 J6.21 U3.69 | length 2240
  Top Layer w10: v1(-1655,790.85) -1652.06,790.85 -1644.75,783.54 FPC_MT1.6@-1580,783.54 -1546.46,783.54 -1485,845 -1420,845 -1350.78,914.22 -1044.22,914.22 -960,830 -892,830 v1(-890,832) ; J6.21@-1094.13,616.69 -1029.8,616.69 -1029.06,615.94 -1010.42,615.94 -1010.05,616.32 -1004.03,616.32 -975.36,645 -919.39,645 -909.39,635 -820.36,635 v1(-820.18,635.18) ; v1(-525,670) -525,910 -493.11,941.89 U3.69@-493.11,1022.24
  Bottom Layer w10: FPC_1.19@-1842.75,783.37 -1706.62,783.37 -1704.94,785.05 -1704.49,785.05 -1699.54,790 -1655.85,790 v1(-1655,790.85) ; v1(-890,832) -890,705 v1(-820.18,635.18) -604.82,635.18 -570,670 v1(-525,670)
"DCMI VSYNC": FPC_1.18 FPC_MT1.7 J6.16 U3.93 | length 1406.3
  Top Layer w10: v1(-1688.9,763) -1688.05,763.85 -1456.15,763.85 v1(-1445,775) ; v1(-1370,635) -1360,635 -1315.18,679.82 -1294.47,679.82 -1290.87,676.22 J6.16@-1236,676.22 -1235,675.22 -1195.22,675.22 -1180,660 v1(-1180,595) ; v1(-784.82,599.82) -784.82,600.18 -758.43,626.57 U3.93@-672.24,626.57
  Bottom Layer w10: FPC_1.18@-1842.75,763.68 -1689.59,763.68 v1(-1688.9,763) ; v1(-1445,775) -1441.21,775 -1430,763.79 -1430,684.19 -1392.81,647 -1385.79,647 -1373.79,635 v1(-1370,635) ; v1(-1180,595) -1175,590 -940,590 -910,620 -855.36,620 -848.36,613 -847.54,613 -834.37,599.82 v1(-784.82,599.82)
DCMI_FSIN: J4.3 J6.23 | length 1422
  Top Layer w10: J6.23@-1094.13,597.01 -988.45,597.01 -965.46,620 v1(-965,620) ; v1(-880,1140) -880,1105 v1(-765,990)
  Bottom Layer w10: v1(-965,620) -917.5,667.5 -917.5,930.47 -857.97,990 v1(-765,990) ; v1(-880,1140) -880.52,1140.52 -897.66,1140.52 -910,1152.86 -910,1230 -875,1265 -790.52,1265 -786.38,1265 -780.52,1270.86 -746.5,1307.71 -737.71,1316.5 -600.1,1316.5 -546.5,1316.5 J4.3@-500,1270